# Altium PCB 主板-20190829.PcbDoc (part 4 of 6)
Units mm, origin at the board's own origin, x right, y up, seen from the top; angles counter-clockwise.
Board outline 97.69 x 103.45 mm, 2 copper layers (Top Layer, Bottom Layer); 77 components, 70 nets, 247 pads, 251 vias.
Unrouted connection lines stored in the file: 4.
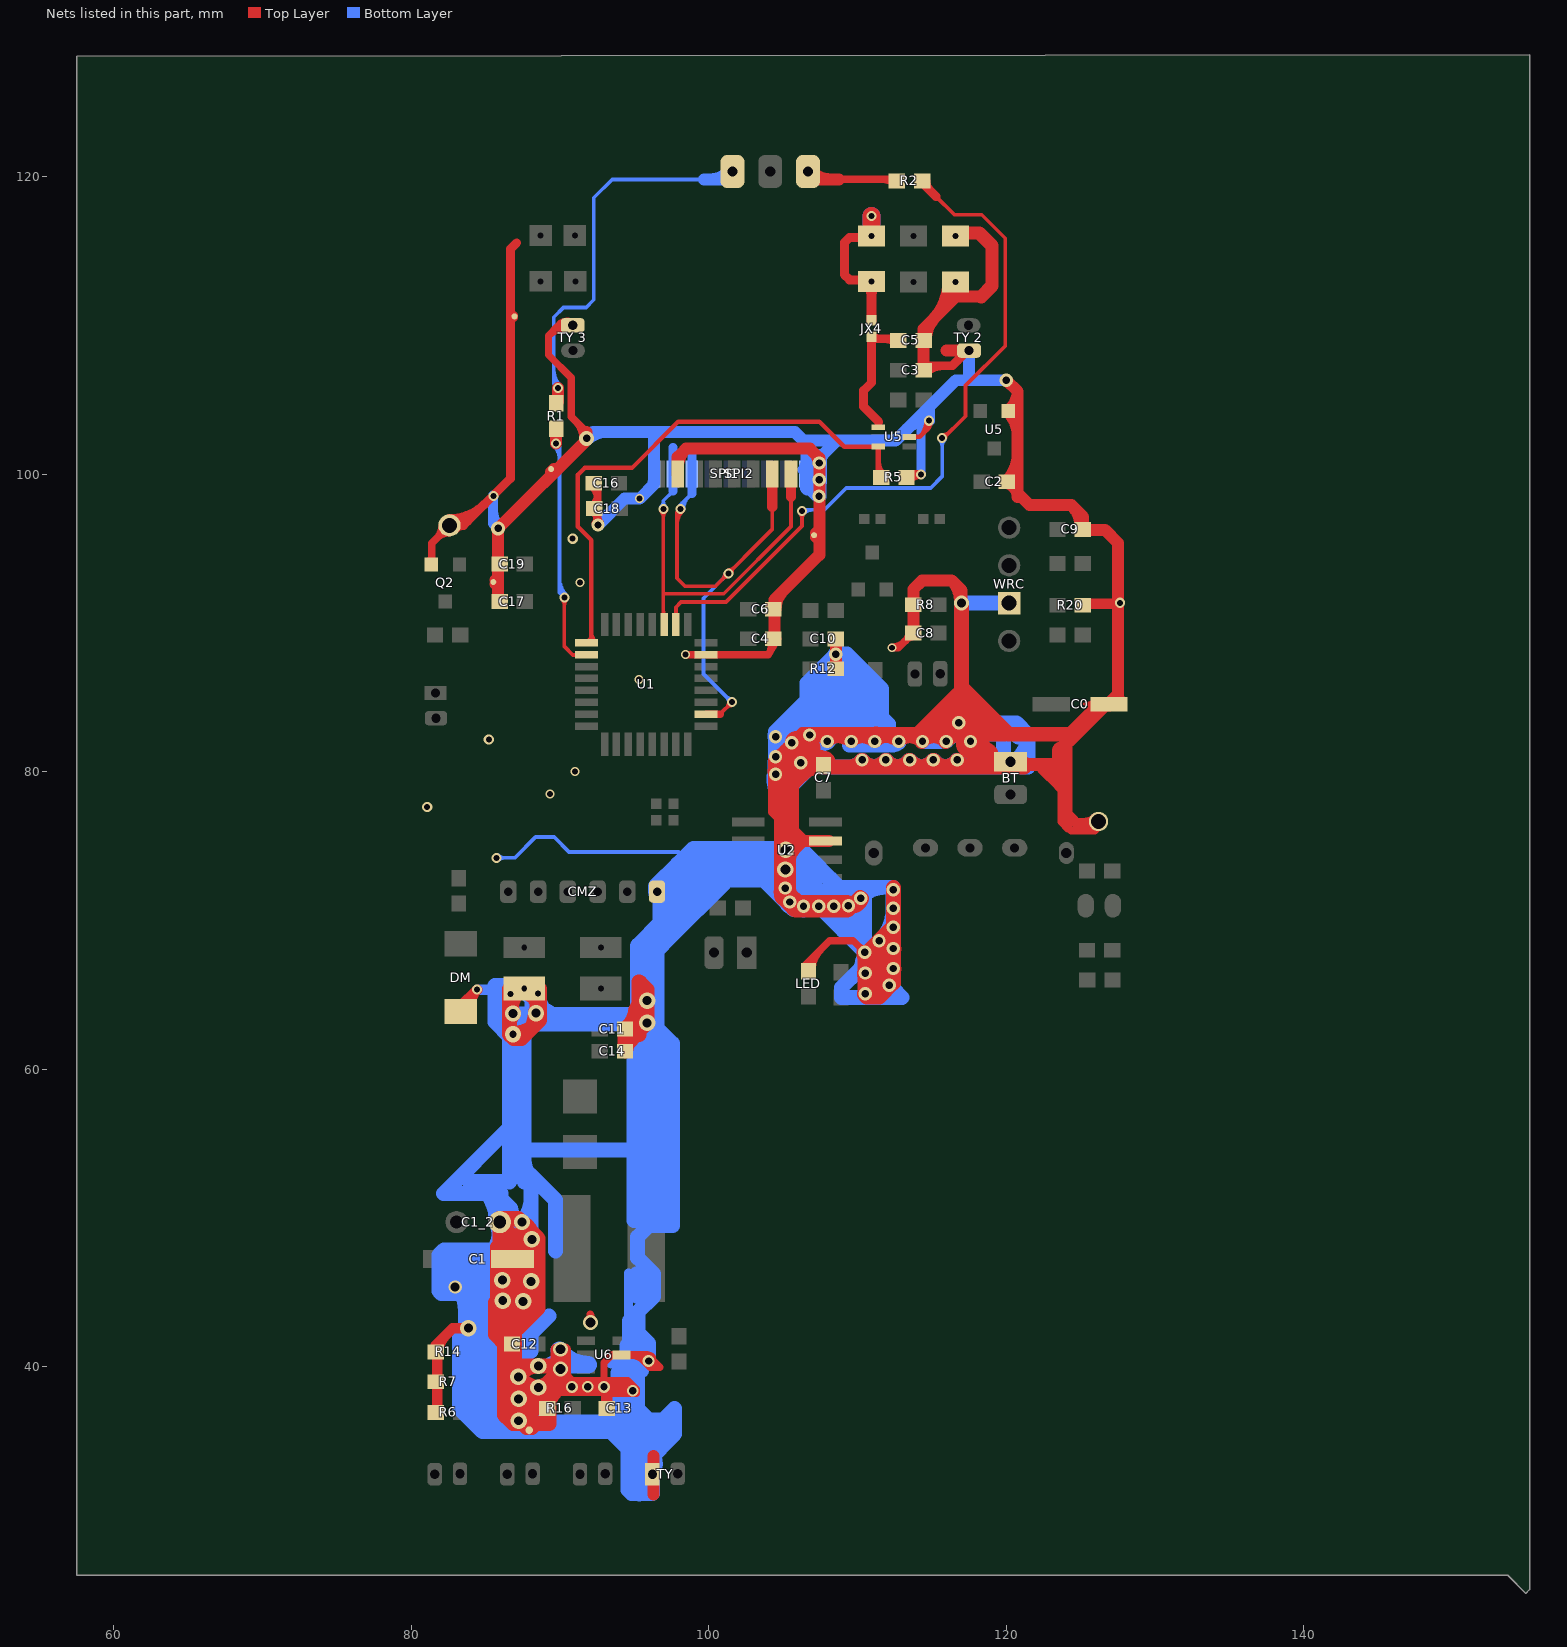
[diagram p4: the nets of this part, all layers, seen from the top]

## Via types
v1: diameter 0.9, hole 0.5, Top Layer to Bottom Layer, 107 vias
v2: diameter 0.68, hole 0.4, Top Layer to Bottom Layer, 87 vias
v3: diameter 1.1, hole 0.6, Top Layer to Bottom Layer, tented both sides, 17 vias
v4: diameter 0.6, hole 0.4, Top Layer to Bottom Layer, 7 vias
v5: diameter 0.8, hole 0.5, Top Layer to Bottom Layer, 5 vias
v6: diameter 0.7, hole 0.4, Top Layer to Bottom Layer, 5 vias
v7: diameter 1, hole 0.6, Top Layer to Bottom Layer, 4 vias
v8: diameter 1, hole 0.8, Top Layer to Bottom Layer, tented both sides, 4 vias
v9: diameter 1, hole 0.65, Top Layer to Bottom Layer, tented both sides, 4 vias
v10: diameter 1.2, hole 0.7, Top Layer to Bottom Layer, tented both sides, 2 vias
v11: diameter 1.1, hole 0.68, Top Layer to Bottom Layer, 2 vias
v12: diameter 0.8, hole 0.4, Top Layer to Bottom Layer, 2 vias
v13: diameter 0.9, hole 0.6, Top Layer to Bottom Layer, tented bottom, 1 vias
v14: diameter 0.95, hole 0.5, Top Layer to Bottom Layer, 1 vias
v15: diameter 0.9, hole 0.6, Top Layer to Bottom Layer, tented both sides, 1 vias
v16: diameter 1, hole 0.5, Top Layer to Bottom Layer, 1 vias
v17: diameter 1.1, hole 0.5, Top Layer to Bottom Layer, tented both sides, 1 vias

## Nets (pads, with @x,y where several pads share a name; then routed paths per layer and width w, separated by ;. In a path a pad name is that pad's centre, name@x,y a point inside that pad or via, vN(x,y) a via of type N, cw(c..) or ccw(c..) an arc to the next point about the centre after c; other vN are vias at no path point) (continued)
GND: (continued)
  Bottom Layer w1: 82.677,45.918 ccw(c83.51,45.918) 82.921,45.329 ccw(c83.939,46.347) 83.939,44.907 ; 82.677,47.346 82.677,45.39 82.702,45.364 83.642,45.364 ; v15@82.925,45.403 cw(c83.262,44.984) 83.642,45.364 ; v15@82.956,45.414 cw(c82.956,43.879) 84.042,44.965 ; v15@82.96,45.414 cw(c82.904,44.679) 83.642,44.679 ; v15@82.992,45.329 ccw(c81.421,46.899) 83.642,46.899 ; v15@82.992,45.4 cw(c81.421,43.829) 83.642,43.829 ; v15@82.994,45.331 cw(c82.042,46.187) 82.042,44.907 ; 83.236,41.003 cw(c85.438,41.003) 83.881,42.56 ccw(c84.457,41.985) 83.642,41.985 ; 83.236,41.734 cw(c84.079,41.734) v3@83.858,42.548 ; 83.642,43.207 ccw(c84.457,43.207) 83.881,42.631 ccw(c84.686,43.436) 84.686,42.298 ; v3@83.81,42.631 ccw(c83.111,43.33) 84.099,43.33 ; v3@83.838,42.546 cw(c83.682,41.541) 84.7,41.541 ; v3@83.838,42.546 cw(c83.699,41.556) 84.7,41.556 ; v3@83.868,42.64 ccw(c84.314,43.524) 85.014,42.824 ; 83.871,52.476 84.861,52.476 ; v3@83.89,42.618 ccw(c84.404,42.87) 84.404,42.298 84.741,42.298 84.995,42.552 ; v3@83.896,42.215 83.896,40.538 84.112,40.322 ; v3@83.976,42.726 v3(83.845,42.596) ; v3@84.049,42.799 v3(83.845,42.596) ; v3@84.099,42.603 84.099,44.907 ; 84.7,37.681 85.103,37.681 85.242,37.821 ; 84.7,42.002 84.7,41.977 ; 84.712,41.99 84.7,41.977 ; 85.119,41.279 85.271,41.431 86.055,42.215 ; 85.242,40.366 85.242,39.192 ; 85.325,35.636 ccw(c85.325,38.272) v3@87.188,36.408 ; 85.446,51.689 85.496,51.638 ; 85.555,43.284 cw(c86.873,43.284) v3@86.183,44.407 ; 85.555,44.309 cw(c87.644,44.309) 86.167,45.786 ccw(c86.69,45.263) 85.95,45.263 ; 85.555,46.024 ccw(c87.731,46.024) 86.192,44.485 cw(c86.777,45.07) 85.95,45.07 ; C1_2.1@85.7,49.737 ccw(c82.701,49.858) 84.823,51.981 86.335,50.47 86.335,48.717 ; C1_2.1@85.73,49.609 cw(c84.419,48.905) 85.471,47.854 ; C1_2.1@85.761,49.891 ccw(c84.793,50.732) 85.7,51.638 ; 85.776,64.442 85.776,64.059 ; C1_2.1@85.794,49.532 cw(c84.892,48.406) 86.335,48.406 ; 85.851,39.929 ccw(c87.204,41.282) v3@87.204,39.369 ; 85.862,46.304 85.555,46.612 ; 85.941,63.69 cw(c88.05,63.69) pad.0@86.559,65.181 ; 85.95,43.83 cw(c86.777,43.83) v3@86.192,44.415 ; 85.95,46.38 ccw(c86.69,46.38) v3@86.167,45.857 ; v3@85.978,45.467 ccw(c86.615,45.092) v3@86.186,44.491 ; 86.004,52.476 84.861,52.476 ; 86.055,51.638 85.7,51.638 ; v3@86.096,45.786 cw(c84.416,44.107) 86.792,44.107 ; v3@86.096,45.857 ccw(c84.416,47.537) 86.792,47.537 ; 86.107,62.712 ccw(c86.843,63.448) v17@86.843,62.407 ; v3@86.121,44.485 ccw(c84.503,46.104) 86.792,46.104 ; v3@86.123,44.487 ccw(c85.58,45.085) v3@86.266,45.512 ; v3@86.132,44.406 cw(c85.499,43.279) 86.792,43.279 ; v3@86.158,45.864 cw(c86.865,46.967) 85.555,46.967 ; 86.423,48.805 ccw(c85.658,49.57) 86.611,50.082 ; 86.438,50.367 cw(c85.804,49.733) 86.699,49.697 ; 86.458,50.879 cw(c85.605,50.026) 86.516,49.236 ; 86.614,36.263 cw(c88.792,36.263) v3@87.259,37.81 ; 86.614,36.386 86.614,39.167 ; 86.614,37.775 cw(c88.748,37.775) v3@87.239,39.284 ; 86.614,37.965 ccw(c88.816,37.965) 87.259,36.408 ccw(c89.123,38.272) 89.123,35.636 ; 86.614,52.426 v17@86.614,62.205 ; 86.614,54.576 87.6,54.576 ; 86.614,56.032 86.563,56.032 82.169,51.638 85.7,51.638 ; 86.614,61.684 cw(c87.515,61.684) v17@86.878,62.322 ; 86.614,63.03 ccw(c87.515,63.03) v17@86.878,62.392 ; 86.614,63.081 cw(c87.515,63.081) v3@86.878,63.719 ; v3@86.614,63.833 v17@86.614,62.205 ; 86.665,48.689 cw(c87.684,48.689) v3@87.463,49.684 ; pad.0@86.764,65.187 ccw(c86.366,64.736) 85.941,65.161 ; 86.778,54.872 86.778,54.951 ; 86.792,43.211 cw(c88.033,43.211) v3@87.548,44.353 ; 86.792,46.298 ccw(c89.427,46.298) v3@87.564,44.435 ; v17@86.807,62.322 cw(c84.893,60.408) 87.6,60.408 ; pad.0@86.808,65.201 ccw(c86.396,64.706) 85.941,65.161 ; v3@86.828,63.802 cw(c86.513,64.796) 85.776,64.059 ; v3@86.84,63.704 ccw(c86.775,62.526) 85.941,63.36 ; v3@86.861,63.8 cw(c87.407,65.161) 85.941,65.161 ; 86.868,41.021 86.893,41.046 ; v3@87.061,36.747 cw(c87.776,37.164) v3@87.255,37.807 ; v3@87.077,38.155 cw(c87.796,38.628) v3@87.236,39.281 ; v3@87.254,37.886 cw(c88.216,39.167) 86.614,39.167 ; v3@87.396,44.071 86.792,43.466 ; pad.0@87.398,65.634 85.629,65.634 85.629,65.354 85.629,63.19 v17@86.614,62.205 ; v3@87.417,49.698 cw(c85.86,48.141) v3@88.062,48.141 ; v3@87.417,49.769 ccw(c85.86,51.326) 88.062,51.326 ; v3@87.458,49.783 cw(c87.561,50.673) 86.665,50.673 ; v3@87.482,44.381 cw(c86.097,43.843) 87.147,42.792 87.916,43.561 ; v3@87.493,44.364 cw(c86.12,42.991) 88.062,42.991 ; v3@87.494,44.436 ccw(c86.267,45.745) v3(88.062,45.745) ; 87.6,52.68 87.6,54.576 ; 87.6,62.944 87.6,54.576 ; pad.0@87.6,65.432 86.208,65.428 86.134,65.354 85.941,65.161 ; 87.8,53.119 88.062,52.857 ; 89.256,43.409 88.062,42.215 ; 89.672,36.108 92.954,36.108 ; 89.704,47.777 89.704,51.215 88.062,52.857 ; 93.955,35.636 93.426,35.636 ; 94.615,37.186 94.656,37.144 ; 94.656,38.056 cw(c95.228,38.056) v5@94.824,38.46 ; 94.656,38.722 ccw(c95.228,38.722) v5@94.824,38.318 ; 94.742,36.108 94.092,36.108 ; v5@94.965,38.318 ccw(c94.339,38.945) 95.225,38.945 ; v5@94.965,38.46 cw(c94.339,37.833) 95.225,37.833 ; 94.971,49.835 94.971,54.576 ; 94.971,62.407 94.971,54.576 ; 95.098,49.835 95.758,50.495 ; 95.148,46.228 95.148,46.076 ; 95.326,50.927 95.326,51.155 ; 95.327,61.713 cw(c97.266,61.713) v3@95.895,63.084 ; 95.329,31.446 cw(c96.428,31.446) TY.2@96.21,32.524 ; 95.329,31.618 cw(c96.235,31.618) TY.2@96.214,32.524 ; 95.329,32.669 cw(c96.181,32.669) TY.2@96.012,33.504 ; 95.504,39.739 cw(c96.368,39.739) v5@95.908,40.471 ; 95.582,34.618 cw(c94.008,33.044) TY.2@96.234,33.044 ; v3@95.824,63.084 cw(c94.758,62.017) 96.266,62.017 ; v3@95.824,63.154 ccw(c94.145,64.834) 96.52,64.834 ; v3@95.824,64.582 cw(c94.145,62.903) 96.52,62.903 ; v3@95.824,64.653 ccw(c94.145,66.333) 96.52,66.333 ; v3@95.828,64.579 cw(c95.295,63.917) v3@96.019,63.472 ; v3@95.838,63.074 cw(c95.5,62.386) 96.266,62.386 ; v3@95.858,63.069 cw(c95.831,62.381) 96.52,62.381 ; v5@95.895,40.311 cw(c96.65,41.173) 95.504,41.173 ; v3@95.904,63.142 ccw(c96.52,63.454) 96.52,62.763 ; 95.961,49.479 97.587,49.479 97.587,51.105 ; 96.012,31.987 TY.2@96.012,32.512 ; TY.2@96.012,32.065 cw(c96.653,32.065) TY.2@96.2,32.518 ; TY.2@96.012,33.484 ccw(c96.653,33.484) TY.2@96.2,33.03 ; TY.2@96.197,33.034 cw(c96.89,33.461) 96.314,34.036 ; TY.2@96.229,33.031 ccw(c95.729,33.501) 96.214,33.986 ; 96.284,35.456 96.314,35.486 ; 96.52,68.123 96.52,62.789 97.587,61.722 97.587,54.576 ; CMZ.2@96.53,71.944 97.866,71.944 99.274,71.944 99.606,72.276 ; 96.743,36.047 cw(c95.261,35.899) 96.314,34.846 ; v1@104.446,79.832 cw(c106.41,79.832) 105.021,81.221 ; v1@104.446,82.347 cw(c105.185,82.347) 104.662,82.869 ; v1@104.449,79.849 ccw(c105.444,79.489) 104.695,78.74 ; v1@104.504,79.881 cw(c104.381,79.194) 105.08,79.194 ; v1@104.53,82.384 cw(c103.378,81.131) 105.08,81.131 ; v1@104.531,79.797 ccw(c103.206,81.122) 105.08,81.122 ; v1@104.531,80.991 ccw(c103.206,82.316) 105.08,82.316 ; v1@104.531,81.061 cw(c103.206,79.736) 105.08,79.736 ; v1@104.534,79.864 cw(c104.039,79.448) 104.496,78.991 ; 105.08,80.86 cw(c106.694,80.86) 105.552,82.001 cw(c106.601,80.952) v1@106.601,82.436 ; v11(105.181,74.752) 106.274,74.752 108.788,72.238 ; v1@105.538,81.966 cw(c108.177,81.966) 106.311,83.832 ; v1@105.541,81.983 cw(c106.324,81.687) 106.324,82.525 ; v1@105.542,81.985 cw(c106.219,81.702) 106.219,82.436 ; v1@105.55,81.998 cw(c106.68,81.048) v1@106.68,82.525 ; v1@105.572,81.918 cw(c105.799,82.601) 105.08,82.601 ; v1@105.596,81.916 ccw(c105.497,82.533) 106.121,82.533 ; 105.618,79.101 ccw(c104.099,80.62) v1@106.247,80.62 ; v1@105.622,81.929 ccw(c104.538,83.083) 106.121,83.083 ; 106,82.2 cw(c106.782,81.418) 106.782,82.524 v1@106.87,82.436 ; 106.136,72.507 106.451,72.822 106.959,73.33 ; 106.649,99.094 cw(c108.943,99.094) v1@107.409,100.799 ; SPI2.8@106.649,99.963 cw(c107.5,99.963) v1@107.438,100.812 ; v1@106.733,82.462 ccw(c107.249,82.587) 107.249,82.057 ; v1@106.746,82.438 ccw(c107.668,83.36) v1@107.668,82.057 ; v1@106.805,82.43 cw(c106.533,82.945) 106.121,82.533 ; v1@106.817,82.438 ccw(c105.308,83.947) 107.442,83.947 ; v1@106.87,82.436 ccw(c107.942,83.507) v1@107.976,81.992 ; v1@107.146,82.436 cw(c107.146,81.213) 108.011,82.077 ccw(c106.931,80.998) v1@106.931,82.525 ; v1@107.406,99.679 ccw(c107.998,99.108) v1(107.417,98.527) ; v1@107.417,98.501 v1(107.417,98.527) ; v1@107.417,99.593 v1(107.417,98.527) ; v1@107.427,99.597 cw(c107.773,100.666) 106.649,100.666 106.649,99.294 v1(107.417,98.527) ; v1@107.442,99.492 v1(107.442,99.644) v1(107.442,100.762) v1@107.442,101.092 ; v1@107.928,82.06 cw(c108.471,81.857) 108.471,82.436 v1@107.975,82.436 ; v1@107.94,82.077 cw(c109.02,80.998) 109.02,82.525 ; v1@108.005,82.002 cw(c107.659,82.466) 107.249,82.057 ; v1@108.011,82.007 ccw(c106.685,83.332) 108.56,83.332 ; v1@108.179,70.915 v1@108.179,70.917 ; 108.179,71.806 108.179,72.517 ; 108.179,72.847 108.179,72.517 ; v1@108.357,70.968 ccw(c110.689,70.968) 109.04,69.319 ; v1@108.44,70.93 cw(c107.936,71.512) v1(107.391,70.968) v1(110.49,67.869) ; v1@108.452,70.946 ccw(c107.199,71.537) 108.179,72.517 ; v1@108.5,87.906 ccw(c109.093,87.945) 109.093,87.351 ; v1@108.505,87.888 ccw(c109.347,88.279) 109.347,87.351 ; v1(108.55,87.909) 106.604,85.963 106.604,84.811 104.496,82.703 v1(104.496,82.347) v1@104.496,80.696 ; 109.267,80.315 ccw(c109.267,81.842) v1@110.347,80.762 ; v1@109.348,70.993 ccw(c111.005,70.993) 109.833,69.821 ; v1@109.356,71.02 cw(c110.236,70.455) v1(110.236,71.501) ; v1@109.358,71.023 ccw(c109.83,70.664) 109.41,70.244 ; v1@109.435,71.026 cw(c109.006,70.648) 109.411,70.244 ; v1@109.447,71.002 cw(c108.279,70.791) 109.118,69.952 109.41,70.244 ; v1@109.539,82.076 cw(c110.583,81.083) 110.583,82.525 ; v1@109.54,82.007 ccw(c110.068,82.535) 110.068,81.788 ; 109.56,66.126 cw(c110.515,65.171) v1@110.515,66.522 ; v1@109.611,82.077 ccw(c108.56,81.066) 108.56,82.525 ; 109.728,86.233 110.363,85.598 110.363,82.781 110.583,82.561 ; 110.001,66.567 ccw(c108.698,67.869) v1@110.54,67.869 ; 110.023,64.821 ccw(c110.023,65.567) v1@110.551,65.039 ; 110.131,82.525 cw(c110.131,80.998) v1@111.211,82.077 ; 110.134,69.52 109.41,70.244 ; v1@110.201,71.536 cw(c111.894,69.843) 111.894,72.238 ; v1@110.238,64.821 ccw(c110.238,67.562) 112.176,65.624 ccw(c111.648,66.152) 112.395,66.152 ; v1@110.271,71.536 cw(c109.743,71.008) 110.49,71.008 ; v1@110.275,71.533 ccw(c108.788,70.318) 108.788,72.238 ; v1@110.276,80.762 ccw(c111.356,81.842) 111.356,80.315 ; 110.365,67.337 ccw(c111.368,67.007) v1@110.473,66.445 ; v1@110.48,65.039 ccw(c111.008,65.567) 111.008,64.821 ; v1@110.528,67.901 cw(c110.047,67.499) 110.49,67.056 ; 110.683,81.788 ccw(c110.683,82.535) v1@111.211,82.007 ; 110.867,80.315 ccw(c110.867,81.842) v1@111.947,80.762 ; v1@111.137,82.074 cw(c112.092,81.286) 112.092,82.525 ; v1@111.14,82.007 ccw(c111.668,82.535) 111.668,81.788 ; v1@111.159,81.995 ccw(c111.584,83.238) v1@112.513,82.309 ; v1@111.491,68.595 ccw(c109.307,70.779) v1@112.395,70.779 ; v1@111.491,68.666 cw(c109.307,66.483) v1@112.395,66.483 ; 111.731,82.525 cw(c111.731,80.998) v1@112.811,82.077 ; v1@111.876,80.762 ccw(c112.956,81.842) 112.956,80.315 ; v1@112.091,65.654 ccw(c113.005,65.738) 113.005,64.821 ; 112.467,80.315 ccw(c112.467,81.842) v1@113.547,80.762 ; v1@112.74,82.077 cw(c113.82,80.998) 113.82,82.525 ; v1@112.748,82 cw(c113.533,83.208) 112.092,83.208 ; v1@112.778,82.092 ccw(c112.729,81.052) 111.992,81.788 ; v1@112.813,82.074 ccw(c112.308,81.648) 112.308,82.309 ; 113.331,82.525 cw(c113.331,80.998) v1@114.411,82.077 ; v1@113.476,80.762 ccw(c114.556,81.842) 114.556,80.315 ; 114.067,80.315 ccw(c114.067,81.842) v1@115.147,80.762 ; v1@114.34,82.077 cw(c115.42,80.998) 115.42,82.525 ; v1(114.375,82.042) 115.545,82.042 116.027,82.525 ; 114.931,82.525 cw(c114.931,80.998) v1@116.011,82.077 ; v1@115.076,80.762 ccw(c116.156,81.842) 116.156,80.315 ; 115.667,80.315 ccw(c115.667,81.842) v1@116.747,80.762 ; v1@115.925,82.042 cw(c116.844,82.042) 116.194,82.692 ; v1@115.94,82.077 cw(c117.02,80.998) 117.02,82.525 ; 116.558,82.525 cw(c116.558,80.998) v1@117.637,82.077 ; v1@116.676,80.762 ccw(c117.756,81.842) 117.756,80.315 ; v1@116.779,83.277 ccw(c118.595,85.092) 118.595,82.525 ; v1@116.864,83.309 cw(c116.027,83.364) 116.027,82.525 ; v7@117.17,91.345 WRC.2@120.2,91.345 ; v1@117.567,82.077 cw(c118.646,80.998) 118.646,82.525 ; 118.618,80.315 ccw(c118.618,81.903) BT.2@119.741,80.78 ; BT.2@119.797,80.533 ccw(c119.484,79.658) 118.828,80.315 ; BT.2@119.954,80.369 ccw(c120.033,80.399) BT.2@120.033,80.315 ; BT.2@120.297,80.674 BT.2@120.297,80.315 ; BT.2@120.655,80.792 ccw(c119.324,82.499) 121.488,82.499 ; 120.828,82.321 119.99,83.16 119.99,83.287 ; BT.2@120.887,80.728 ccw(c121.488,80.959) 121.488,80.315 ; 82.042,44.907 81.864,45.085 81.864,47.523 82.194,47.854 83.948,47.854 ; 82.042,44.907 83.642,44.907 ; v3@83.642,42.393 83.236,41.986 83.236,37.186 84.785,35.636 92.481,35.636 ; v3@83.642,42.393 v3(83.845,42.596) ; v3@83.642,42.393 83.642,38.151 84.112,37.681 ; v3@83.642,42.393 83.642,43.06 83.642,44.907 ; 83.642,44.907 cw(c83.642,45.738) 82.912,45.34 ccw(c83.642,45.738) 83.642,44.907 ; 83.642,44.907 84.099,44.907 ; 83.642,44.907 83.642,45.364 ; 83.642,45.364 84.099,44.907 ; 83.642,45.364 83.642,47.547 ; 83.642,47.547 83.948,47.854 ; 83.642,47.547 83.947,47.547 84.099,47.395 84.099,44.907 ; 83.948,47.854 85.471,47.854 ; 84.099,44.907 85.014,43.993 ; 84.112,37.681 84.112,36.614 84.7,37.202 84.7,39.735 ; 84.112,37.681 84.112,40.322 ; 84.112,40.322 84.112,41.389 84.7,41.977 ; 84.112,40.322 84.7,39.735 ; 84.7,39.735 85.242,39.192 ; 84.7,39.735 84.7,41.977 ; 84.734,41.046 ccw(c86.12,42.432) 86.354,40.486 ; 84.734,41.046 ccw(c86.12,42.432) 86.354,40.486 ; 84.734,41.046 ccw(c86.12,42.432) 86.354,40.486 ; 84.734,41.046 86.614,39.167 ; 84.734,41.046 85.656,41.046 ; 84.861,52.476 85.7,51.638 ; 84.995,42.552 85.014,42.57 ; 84.995,42.552 85.014,42.552 85.014,42.57 ; 84.995,42.552 84.741,42.552 85.014,42.824 ; 85.014,42.57 85.014,42.824 ; 85.014,42.57 85.598,43.155 85.598,43.409 85.555,43.452 ; 85.014,42.824 85.014,43.993 ; 85.014,42.824 85.555,43.365 85.555,43.452 ; 85.014,43.993 85.014,47.396 85.471,47.854 ; 85.014,43.993 85.555,43.452 ; 85.242,37.821 85.496,38.075 85.496,36.144 84.658,36.982 85.242,37.567 85.242,37.821 ; 85.242,37.821 85.242,39.192 ; 85.242,39.192 86.055,38.379 86.055,36.297 92.765,36.297 92.954,36.108 ; 85.242,46.924 cw(c85.685,46.482) 86.122,46.929 ; 85.242,46.924 cw(c85.685,46.482) 86.122,46.929 ; 85.242,46.924 cw(c85.685,46.482) 86.122,46.929 ; 85.242,46.924 85.42,47.102 ; 85.242,46.924 85.555,46.612 ; 85.42,46.912 cw(c87.084,46.912) 86.159,48.295 ; 85.42,46.912 cw(c87.084,46.912) 86.159,48.295 ; 85.42,46.912 cw(c87.084,46.912) 86.159,48.295 ; 85.42,47.102 ccw(c85.837,47.519) 86.132,47.008 ; 85.42,47.102 ccw(c85.837,47.519) 86.132,47.008 ; 85.42,47.102 ccw(c85.837,47.519) 86.132,47.008 ; 85.42,47.102 85.555,46.967 ; 85.42,47.102 85.95,47.632 ; 85.471,47.854 86.335,48.717 ; 85.471,47.854 85.725,47.854 86.335,48.463 86.335,48.717 ; 85.555,43.452 85.555,46.612 ; 85.555,46.612 ccw(c86.316,46.612) 86.143,45.87 cw(c86.316,46.612) 85.555,46.612 ; 85.555,46.612 85.555,46.967 ; 85.656,41.046 cw(c85.656,40.391) 86.31,40.434 ; 85.656,41.046 cw(c85.656,40.391) 86.31,40.434 ; 85.656,41.046 cw(c85.656,40.391) 86.31,40.434 ; 85.674,41.046 cw(c85.674,40.41) 86.31,40.435 ccw(c85.674,40.41) 85.674,41.046 ; 85.674,41.046 86.893,41.046 ; 85.676,47.358 ccw(c84.698,48.336) 86.081,48.336 ; 85.676,47.358 ccw(c84.698,48.336) 86.081,48.336 ; 85.676,47.358 ccw(c84.698,48.336) 86.081,48.336 ; 85.7,51.638 86.665,50.673 ; 85.776,64.059 85.941,63.894 ; 85.941,63.36 85.941,63.894 ; 85.941,63.36 86.208,63.627 85.941,63.894 ; 85.941,63.894 ccw(c86.439,64.392) 86.816,63.796 cw(c86.439,64.392) 85.941,63.894 ; 85.941,63.894 85.941,65.161 ; 85.95,42.624 85.95,47.632 ; 85.95,42.624 86.792,43.466 ; 85.95,42.624 85.95,42.472 86.792,43.314 86.792,43.466 ; 85.95,47.585 ccw(c86.777,47.585) 86.192,47 ; 85.95,47.585 ccw(c86.777,47.585) 86.192,47 ; 85.95,47.585 ccw(c86.777,47.585) 86.192,47 ; 85.95,47.585 ccw(c86.777,47.585) 86.192,47 ; 85.95,47.585 ccw(c86.777,47.585) 86.192,47 ; 85.95,47.585 ccw(c86.777,47.585) 86.192,47 ; 85.95,47.585 ccw(c86.777,47.585) 86.192,47 ; 85.95,47.585 ccw(c86.777,47.585) 86.192,47 ; 85.95,47.585 ccw(c86.777,47.585) 86.192,47 ; 85.95,47.632 ccw(c85.506,48.075) 86.085,48.317 ; 85.95,47.632 ccw(c85.506,48.075) 86.085,48.317 ; 85.95,47.632 ccw(c85.506,48.075) 86.085,48.317 ; 85.95,47.632 ccw(c85.506,48.075) 86.085,48.317 ; 85.95,47.632 ccw(c85.506,48.075) 86.085,48.317 ; 85.95,47.632 ccw(c85.506,48.075) 86.085,48.317 ; 85.95,47.632 86.792,48.473 ; 85.95,47.778 cw(c86.69,47.778) 86.167,48.301 ; 85.95,47.778 cw(c86.69,47.778) 86.167,48.301 ; 85.95,47.778 cw(c86.69,47.778) 86.167,48.301 ; 85.95,47.778 cw(c86.69,47.778) 86.167,48.301 ; 85.95,47.778 cw(c86.69,47.778) 86.167,48.301 ; 85.95,47.778 cw(c86.69,47.778) 86.167,48.301 ; 85.95,47.778 cw(c86.69,47.778) 86.167,48.301 ; 85.95,47.778 cw(c86.69,47.778) 86.167,48.301 ; 85.95,47.778 cw(c86.69,47.778) 86.167,48.301 ; 86.032,47.242 cw(c86.712,47.693) 86.165,48.299 ; 86.032,47.242 cw(c86.712,47.693) 86.165,48.299 ; 86.032,47.242 cw(c86.712,47.693) 86.165,48.299 ; 86.032,47.242 cw(c86.712,47.693) 86.165,48.299 ; 86.032,47.242 cw(c86.712,47.693) 86.165,48.299 ; 86.032,47.242 cw(c86.712,47.693) 86.165,48.299 ; 86.048,41.046 cw(c86.048,38.931) 87.544,40.427 ; 86.048,41.046 cw(c86.048,38.931) 87.544,40.427 ; 86.048,41.046 cw(c86.048,38.931) 87.544,40.427 ; 86.102,48.296 cw(c85.656,47.674) 86.288,47.241 ; 86.102,48.296 cw(c85.656,47.674) 86.288,47.241 ; 86.102,48.296 cw(c85.656,47.674) 86.288,47.241 ; 86.102,48.296 cw(c85.656,47.674) 86.288,47.241 ; 86.102,48.296 cw(c85.656,47.674) 86.288,47.241 ; 86.102,48.296 cw(c85.656,47.674) 86.288,47.241 ; 86.11,48.291 cw(c85.896,47.826) 86.392,47.701 ; 86.11,48.291 cw(c85.896,47.826) 86.392,47.701 ; 86.11,48.291 cw(c85.896,47.826) 86.392,47.701 ; 86.11,48.291 cw(c85.896,47.826) 86.392,47.701 ; 86.11,48.291 cw(c85.896,47.826) 86.392,47.701 ; 86.11,48.291 cw(c85.896,47.826) 86.392,47.701 ; 86.123,47.002 ccw(c85.58,47.6) 86.266,48.027 ; 86.123,47.002 ccw(c85.58,47.6) 86.266,48.027 ; 86.123,47.002 ccw(c85.58,47.6) 86.266,48.027 ; 86.124,47.002 ccw(c84.838,48.473) 86.792,48.473 ; 86.124,47.002 ccw(c84.838,48.473) 86.792,48.473 ; 86.124,47.002 ccw(c84.838,48.473) 86.792,48.473 ; 86.152,48.382 ccw(c86.391,48.925) 86.859,48.56 ; 86.152,48.382 ccw(c86.391,48.925) 86.859,48.56 ; 86.152,48.382 ccw(c86.391,48.925) 86.859,48.56 ; 86.152,48.382 ccw(c86.391,48.925) 86.859,48.56 ; 86.152,48.382 ccw(c86.391,48.925) 86.859,48.56 ; 86.152,48.382 ccw(c86.391,48.925) 86.859,48.56 ; 86.155,48.38 ccw(c86.411,48.854) 86.792,48.473 ; 86.155,48.38 ccw(c86.411,48.854) 86.792,48.473 ; 86.155,48.38 ccw(c86.411,48.854) 86.792,48.473 ; 86.207,46.967 cw(c88.209,47.056) 86.792,48.473 ; 86.207,46.967 cw(c88.209,47.056) 86.792,48.473 ; 86.207,46.967 cw(c88.209,47.056) 86.792,48.473 ; 86.335,48.717 86.665,49.047 86.665,50.673 ; 86.395,40.401 cw(c87.952,38.844) 87.952,41.046 ; 86.395,40.401 cw(c87.952,38.844) 87.952,41.046 ; 86.395,40.401 cw(c87.952,38.844) 87.952,41.046 ; 86.401,40.408 cw(c86.939,40.029) 87.286,40.587 ; 86.401,40.408 cw(c86.939,40.029) 87.286,40.587 ; 86.401,40.408 cw(c86.939,40.029) 87.286,40.587 ; 86.401,40.408 cw(c86.939,40.029) 87.286,40.587 ; 86.41,40.442 cw(c88.957,40.691) 87.147,42.501 ; 86.41,40.442 cw(c88.957,40.691) 87.147,42.501 ; 86.41,40.442 cw(c88.957,40.691) 87.147,42.501 ; 86.646,40.553 cw(c87.017,39.941) 87.543,40.428 ; 86.646,40.553 cw(c87.017,39.941) 87.543,40.428 ; 86.646,40.553 cw(c87.017,39.941) 87.543,40.428 ; 86.731,53.985 ccw(c84.633,56.083) 87.6,56.083 ; 86.731,53.985 ccw(c84.633,56.083) 87.6,56.083 ; 86.731,53.985 ccw(c84.633,56.083) 87.6,56.083 ; 86.742,53.906 cw(c85.902,52.43) 87.6,52.43 ; 86.742,53.906 cw(c85.902,52.43) 87.6,52.43 ; 86.742,53.906 cw(c85.902,52.43) 87.6,52.43 ; 86.792,43.466 86.792,48.473 ; 86.792,48.473 ccw(c88.681,48.473) 87.558,46.954 ; 86.792,48.473 ccw(c88.681,48.473) 87.558,46.954 ; 86.792,48.473 ccw(c88.681,48.473) 87.558,46.954 ; 86.893,41.046 88.062,42.215 ; 86.893,41.046 88.062,41.046 88.062,42.215 ; 87.544,40.498 ccw(c86.293,41.748) 88.062,41.748 ; 87.544,40.498 ccw(c86.293,41.748) 88.062,41.748 ; 87.544,40.498 ccw(c86.293,41.748) 88.062,41.748 ; 87.6,53.869 ccw(c89.124,53.869) 88.046,52.791 ; 87.6,53.869 ccw(c89.124,53.869) 88.046,52.791 ; 87.6,53.869 ccw(c89.124,53.869) 88.046,52.791 ; 87.6,54.576 94.971,54.576 ; 88.062,42.215 v3(88.062,45.745) ; v3(88.062,45.745) 88.062,52.857 ; 92.481,35.636 92.954,36.108 ; 92.481,35.636 93.426,35.636 ; 92.954,36.108 93.523,36.678 94.092,36.108 ; 92.954,36.108 93.426,35.636 ; 92.954,36.108 94.092,36.108 ; 93.426,35.636 94.564,34.498 ; 94.092,36.108 96.214,33.986 ; 94.564,34.498 94.564,31.773 94.564,31.725 94.819,31.47 96.214,31.47 TY.2@96.214,32.714 ; 94.564,34.498 95.329,33.734 95.329,32.537 95.329,31.925 95.377,31.877 TY.2@96.012,32.512 ; 94.656,37.144 96.314,35.486 ; 94.656,37.144 94.656,43.094 95.241,43.679 ; 94.656,37.144 94.656,36.432 96.284,34.804 ; 94.971,54.576 95.327,54.576 ; 95.148,46.076 95.148,44.806 95.225,44.729 ; 95.148,46.076 95.225,46.152 95.225,44.729 ; 95.225,44.729 95.898,45.402 95.898,46.647 ; 95.241,43.679 95.241,42.078 95.463,42.078 95.961,41.58 v5(95.961,40.386) 95.504,39.929 95.504,41.173 ; 95.241,43.679 96.291,44.729 96.291,46.253 95.898,46.647 ; 95.327,54.576 95.327,62.763 96.52,62.763 ; 95.327,54.576 95.327,50.926 95.758,50.495 ; 95.327,54.576 96.266,54.576 ; 95.504,41.173 94.92,41.758 94.92,39.345 95.225,39.649 95.225,37.173 95.965,36.432 96.947,36.432 97.714,37.199 97.714,35.481 96.763,34.53 96.763,34.485 96.314,34.036 ; 95.758,50.495 96.368,49.886 96.368,50.165 96.266,50.063 96.266,54.576 ; v3@95.86,63.069 cw(c95.86,62.212) 96.465,62.818 ccw(c95.86,62.212) v3@95.86,63.069 ; v3@95.86,63.069 cw(c95.86,62.151) 96.509,62.8 ccw(c95.86,62.151) v3@95.86,63.069 ; 95.898,46.647 95.225,47.32 95.225,48.743 96.901,50.419 ; TY.2@96.012,32.512 96.012,33.734 96.214,33.936 ; TY.2@96.012,32.512 TY.2@96.214,32.714 ; TY.2@96.199,33.031 cw(c96.674,33.476) 96.214,33.936 ; TY.2@96.199,33.031 cw(c96.674,33.476) 96.214,33.936 ; TY.2@96.214,32.714 TY.2@96.214,32.774 96.214,33.936 ; 96.214,33.936 96.284,34.006 ; 96.214,33.936 96.214,33.986 ; 96.266,54.576 96.901,54.576 ; 96.266,54.576 96.266,62.509 96.52,62.763 ; 96.284,34.006 ccw(c96.823,33.468) 96.198,33.033 cw(c96.823,33.468) 96.284,34.006 ; 96.284,34.006 96.314,34.036 ; 96.284,34.006 96.284,34.804 ; 96.284,34.804 96.284,34.816 96.314,34.846 ; 96.284,34.804 96.314,34.774 ; 96.314,34.036 96.314,34.774 ; 96.314,34.774 96.314,34.846 ; 96.314,34.846 97.358,35.89 97.231,36.017 96.845,36.017 96.314,35.486 ; 96.314,34.846 96.314,35.486 ; 96.52,62.763 96.901,62.382 96.901,54.576 ; 96.674,35.846 ccw(c96.502,36.017) 96.745,36.017 ; 96.674,35.846 ccw(c96.502,36.017) 96.745,36.017 ; 96.674,35.846 ccw(c96.502,36.017) 96.745,36.017 ; 96.901,50.419 97.176,50.694 ; 96.901,50.419 96.901,54.576 ; 96.901,54.576 97.176,54.576 ; 97.176,50.694 97.176,54.576 ; 97.176,50.694 97.587,51.105 ; 97.176,54.576 97.587,54.576 ; 97.587,51.105 97.587,54.576 ; 104.496,78.991 105.08,79.575 105.08,81.28 ; 104.496,78.991 v1@104.496,80.696 ; v1@104.496,80.696 105.08,81.28 ; v1@104.496,80.696 104.47,80.67 104.47,78.965 104.696,78.74 ; v1@104.496,80.976 ccw(c104.496,81.652) 104.974,81.174 ; v1@104.496,80.976 ccw(c104.496,81.652) 104.974,81.174 ; v1@104.496,80.976 ccw(c104.496,81.652) 104.974,81.174 ; 104.696,78.74 ccw(c104.696,79.429) 105.356,79.234 ; 104.696,78.74 ccw(c104.696,79.429) 105.356,79.234 ; 104.696,78.74 ccw(c104.696,79.429) 105.356,79.234 ; 104.696,78.74 105.258,78.74 106.832,80.315 118.828,80.315 ; 105.08,81.28 106.235,82.436 ; 105.08,81.28 105.08,82.601 ; 105.08,82.601 106.782,84.303 ; 105.308,79.198 ccw(c105.308,80.181) 106.004,79.486 ; 105.308,79.198 ccw(c105.308,80.181) 106.004,79.486 ; 105.308,79.198 ccw(c105.308,80.181) 106.004,79.486 ; 105.321,79.2 ccw(c105.05,80.211) 105.957,79.688 ; 105.321,79.2 ccw(c105.05,80.211) 105.957,79.688 ; 105.321,79.2 ccw(c105.05,80.211) 105.957,79.688 ; 105.321,79.2 ccw(c105.05,80.211) 105.957,79.688 ; 105.321,79.2 ccw(c105.05,80.211) 105.957,79.688 ; 105.321,79.2 ccw(c105.05,80.211) 105.957,79.688 ; 106.121,82.533 106.219,82.436 ; 106.121,82.533 106.121,83.083 ; 106.121,83.083 v1@106.68,82.525 ; 106.219,82.436 106.235,82.436 ; 106.235,82.436 ccw(c106.235,81.676) 105.542,81.986 cw(c106.235,81.676) 106.235,82.436 ; 106.235,82.436 106.324,82.525 ; 106.235,82.436 v1@106.87,82.436 ; 106.324,82.525 v1@106.68,82.525 ; v1@106.68,82.525 v1@106.782,82.525 ; v1@106.782,82.525 106.782,84.303 ; v1@106.782,82.525 v1@106.931,82.525 ; 106.782,84.303 106.782,84.379 107.112,84.709 107.15,84.671 ; 106.782,84.303 107.15,84.671 ; v1@106.87,82.436 107.249,82.057 ; v1@106.87,82.436 v1@107.975,82.436 ; v1@106.931,82.525 107.975,82.525 ; v1@106.931,82.525 107.442,83.036 107.442,84.379 107.15,84.671 ; 107.15,84.671 107.975,85.496 ; 107.249,82.057 v1@107.927,82.057 ; v1@107.927,82.057 cw(c108.56,81.864) 108.56,82.525 ; v1@107.927,82.057 cw(c108.56,81.864) 108.56,82.525 ; v1@107.927,82.057 107.975,82.105 v1@107.975,82.436 ; v1@107.975,82.436 107.975,82.525 ; 107.975,82.525 107.975,85.496 ; 107.975,82.525 108.56,82.525 ; 107.975,85.496 108.56,86.081 ; 107.975,85.496 107.975,86.081 ; 107.975,86.081 107.975,86.589 106.883,85.496 106.883,85.014 107.95,86.081 107.975,86.081 ; 107.975,86.081 108.56,86.081 ; 108.179,72.517 109.195,71.501 v1(110.236,71.501) ; 108.56,82.525 109.466,82.525 ; 108.56,82.525 108.56,86.081 ; 108.56,86.081 108.56,87.909 109.296,87.909 111.633,85.573 111.633,83.668 112.092,83.208 ; 108.788,72.238 112.395,72.238 112.395,65.43 113.005,64.821 ; 109.093,87.351 109.347,87.351 ; 109.093,87.351 109.466,86.977 109.466,82.525 ; 109.347,87.351 111.049,85.649 111.049,83.026 110.583,82.561 ; 109.466,82.525 110.583,82.525 ; 109.466,82.525 109.466,81.788 111.992,81.788 ; v1(110.236,71.501) 110.49,71.247 v1(110.49,67.869) ; 110.49,67.056 v1(110.49,67.869) ; 110.49,67.056 108.941,65.507 108.941,64.821 113.005,64.821 ; 110.583,82.525 cw(c110.583,81.854) 111.223,82.057 ccw(c110.583,81.854) 110.583,82.525 ; 110.583,82.525 110.62,82.525 ; 110.583,82.525 110.583,82.561 ; 110.583,82.525 110.583,82.488 110.62,82.525 ; 110.583,82.561 110.62,82.525 ; 110.62,82.525 cw(c110.62,81.902) 111.224,82.054 ccw(c110.62,81.902) 110.62,82.525 ; 110.62,82.525 112.092,82.525 ; 111.992,81.788 v1@112.513,82.309 ; 112.092,82.525 cw(c112.092,81.72) 112.82,82.063 ccw(c112.092,81.72) 112.092,82.525 ; 112.092,82.525 112.092,83.208 ; 112.092,82.525 116.027,82.525 ; 112.092,82.525 112.308,82.309 ; 112.308,82.309 v1@112.513,82.309 ; 116.027,82.525 119.507,82.525 119.812,82.829 119.812,81.299 118.828,80.315 ; 116.027,82.525 116.789,83.287 119.99,83.287 ; 118.828,80.315 ccw(c118.828,81.439) 119.727,80.764 cw(c118.828,81.439) 118.828,80.315 ; 118.828,80.315 BT.2@120.297,80.315 ; 119.99,83.287 120.701,83.287 121.488,82.499 ; BT.2@120.297,80.315 121.488,80.315 ; 121.488,80.315 121.488,82.499 ; v15@82.969,45.413 cw(c82.74,44.54) 83.642,44.54 ccw(c82.74,44.54) v15@82.969,45.413 ; 84.768,41.046 cw(c84.768,38.844) 86.325,40.401 ccw(c84.768,38.844) 84.768,41.046 ; 85.674,40.589 ccw(c86.081,40.996) 86.338,40.482 cw(c86.081,40.996) 85.674,40.589 ; C1_2.1@85.828,49.509 cw(c85.347,48.647) 86.335,48.647 ccw(c85.347,48.647) C1_2.1@85.828,49.509 ; 95.329,32.642 cw(c96.211,32.642) 96.19,33.524 ccw(c96.211,32.642) 95.329,32.642 ; v1@104.496,82.297 ccw(c104.496,82.972) 104.974,82.495 cw(c104.496,82.972) v1@104.496,82.297 ; 105.08,81.112 cw(c106.154,81.112) 105.56,82.007 ccw(c106.154,81.112) 105.08,81.112 ; v1@106.162,80.584 ccw(c106.813,81.235) 106.813,80.315 cw(c106.813,81.235) v1@106.162,80.584 ; 108.179,71.399 ccw(c108.838,71.399) 108.372,70.932 cw(c108.838,71.399) 108.179,71.399 ; 109.268,71.428 cw(c108.833,70.993) 109.448,70.993 ccw(c108.833,70.993) 109.268,71.428 ; 112.283,81.788 ccw(c112.283,82.535) 112.811,82.007 cw(c112.283,82.535) 112.283,81.788
  Bottom Layer w1.2: pad.0@87.663,65.312 pad.0@88.197,64.778 ; pad.0@87.847,65.129 ccw(c88.519,65.801) pad.0@88.519,64.85 ; pad.0@87.909,65.066 cw(c86.622,63.779) v3@88.442,63.779 ; pad.0@88.197,64.778 cw(c87.493,64.074) 88.44,63.764 ccw(c87.493,64.074) pad.0@88.197,64.778 ; pad.0@88.287,65.194 ccw(c88.969,64.918) 88.332,64.55 ; v3@88.368,63.824 cw(c88.736,63.133) 89.289,63.686 ; v3@88.392,63.829 cw(c88.392,62.01) 89.679,63.296 ; v3@88.439,63.763 ccw(c87.514,64.079) pad.0@88.205,64.77 ; 89.484,40.132 91.897,40.132 cw(c91.897,42.529) v9@89.962,41.114 ; 89.61,40.132 cw(c89.61,39.419) v9@90.114,39.923 ; v9@89.972,39.923 cw(c90.476,39.419) 90.476,40.132 ; 94.615,37.186 94.615,41.395 ; 94.971,62.407 95.327,62.763 v3@95.708,63.144 ; 95.152,63.402 94.894,63.144 ; 95.326,63.786 cw(c96.334,63.786) v3@95.835,64.661 ; 95.326,64.286 ccw(c97.027,64.286) v3@95.824,63.084 ; 95.326,65.785 ccw(c97.027,65.785) v3@95.824,64.582 ; 95.656,63.906 95.656,66.345 ; 95.656,66.712 95.656,67.632 ; v3@95.834,63.076 cw(c96.383,63.979) 95.326,63.979 95.326,68.301 96.825,69.799 96.825,71.649 CMZ.2@96.53,71.944 96.53,72.298 97.98,73.749 98.994,74.762 102.093,74.762 ; v3@95.894,63.155 ccw(c95.4,62.639) 94.894,63.144 ; v3@95.903,64.643 cw(c94.832,64.02) v3@95.708,63.144 ; 96.241,63.677 v3@95.708,63.144 ; 96.52,68.123 97.307,68.91 ; CMZ.2@96.565,71.779 cw(c95.939,71.153) 96.825,71.153 ; 97.307,71.166 97.866,70.608 97.866,71.944 97.866,72.583 98.867,73.584 98.867,73.203 ; 98.892,72.306 100.576,73.99 99.466,73.99 99.466,73.152 ; 99.606,72.276 102.093,74.762 ; 100.774,73.317 97.307,69.85 97.307,68.91 ; 101.466,73.343 100.96,72.836 ; 103.156,73.863 ccw(c103.156,76.778) v11@105.217,74.717 ; 103.84,72.836 ccw(c103.84,74.748) v11@105.191,73.396 ; 103.95,72.836 cw(c103.95,70.981) v1@105.262,72.293 ; 104.111,72.47 ccw(c105.156,73.514) v1@105.156,72.037 ; 104.234,73.863 cw(c104.234,72.51) v11@105.191,73.467 ; v1@105.006,72.187 ccw(c106.484,72.187) v1@105.439,71.142 ; v1@105.05,72.081 ccw(c106.365,73.396) 106.365,71.536 ; v1@105.05,72.293 cw(c106.327,71.016) 106.327,72.822 ; v11@105.054,73.431 102.768,73.431 102.593,73.256 ; v1@105.068,72.308 cw(c105.552,71.638) 106.136,72.222 ; v11@105.12,73.397 ccw(c106.451,74.651) 106.451,72.822 ; v11@105.121,73.467 cw(c106.078,72.51) 106.078,73.863 ; v11@105.135,74.733 ccw(c106.426,75.256) 106.426,73.863 ; v11(105.181,74.752) 105.171,74.762 102.093,74.762 ; v11@105.206,73.429 cw(c104.583,73.46) 104.583,72.836 ; v1@105.294,72.245 cw(c104.699,71.993) v1@105.156,71.536 ; v1@105.305,72.207 ccw(c104.583,72.108) 104.583,72.836 ; v1@105.311,71.247 cw(c106.382,71.247) 105.625,72.005 ; v1@105.33,71.25 ccw(c106.375,72.295) v1@106.375,70.818 ; v1@105.355,71.141 ccw(c106.08,71.866) v1@106.08,70.841 ; v1@105.355,71.353 cw(c107.122,69.586) 107.122,72.085 ; v1@105.365,71.536 cw(c105.365,69.957) v1@106.481,71.074 ; 105.461,72.822 106.451,72.822 ; 105.994,72.365 106.136,72.222 ; 106.136,72.507 106.136,72.222 ; v1@106.269,71.074 cw(c107.385,69.957) 107.385,71.536 ; 106.381,71.536 cw(c106.381,69.957) v1@107.497,71.074 ; 106.959,73.33 106.426,73.863 ; 107.163,72.822 106.451,72.822 ; 107.213,72.085 105.705,72.085 v1@105.156,71.536 ; v1@107.285,71.074 cw(c108.401,69.957) 108.401,71.536 ; 107.397,71.536 cw(c107.397,69.957) v1@108.513,71.074 ; v1@108.179,70.917 108.179,71.12 v1@108.179,71.145 ; v1@108.258,70.986 cw(c108.88,70.909) 108.88,71.536 ; v1@108.355,71.108 cw(c108.756,70.021) v1@109.576,70.841 ; 108.449,71.536 cw(c108.449,70.044) v1@109.504,71.099 ; v1@109.004,70.841 ccw(c109.004,72.733) v1@110.342,71.395 ; v1@109.542,71.033 ccw(c108.88,70.849) 108.88,71.536 ; 109.576,70.567 cw(c110.835,70.567) v1@110.155,71.627 ; v1@110.316,71.374 cw(c109.7,72.355) 108.88,71.536 ; v1@110.381,71.463 cw(c109.576,71.673) v1@109.576,70.841 ; pad.0@88.197,64.778 pad.0@88.205,64.77 ; pad.0@88.205,64.77 88.205,63.686 89.289,63.686 ; 89.289,63.686 89.831,63.144 89.84,63.144 94.894,63.144 ; 94.894,63.144 v3@95.708,63.144 ; 97.307,68.91 100.96,72.563 100.96,72.836 ; 100.96,72.836 102.173,72.836 ; 102.173,72.836 102.593,73.256 ; 102.173,72.836 103.014,72.836 ; 102.593,73.256 103.014,72.836 ; 102.593,73.256 101.987,73.863 105.181,73.863 106.426,73.863 ; 103.014,72.836 103.745,72.836 ; 103.745,72.836 105.74,70.841 v1@109.576,70.841 ; 103.745,72.836 104.583,72.836 ; v1@105.156,71.536 108.88,71.536 ; 108.88,71.536 v1@109.576,70.841 ; pad.0@88.289,65.198 ccw(c88.956,64.914) 88.328,64.551 cw(c88.956,64.914) pad.0@88.289,65.198
  Bottom Layer w1.5: v11@105.181,72.923 105.181,73.863 v11@105.181,74.574 ; v11@105.326,73.326 ccw(c104.466,73.859) v11@105.181,74.574 ; v11@105.33,73.333 ccw(c104.408,73.852) 105.156,74.6 v11@105.181,74.574
  other v1: 110.515,65.075 112.141,65.659 110.515,66.472 111.455,68.631 106.375,70.968 108.407,70.968 109.398,70.993 105.461,71.247 112.42,72.06 105.156,72.187 104.496,79.832 106.197,80.62 110.312,80.797 111.912,80.797 113.512,80.797 115.112,80.797 116.712,80.797 105.588,81.966 107.975,82.042 109.575,82.042 111.175,82.042 112.775,82.042 115.975,82.042 106.782,82.474
  other v2: 81.077,77.622 85.217,82.169 127.66,91.364
  other v3: 87.224,36.373 87.224,37.846 87.204,39.319 87.528,44.399 88.113,48.565 86.843,63.754 88.392,63.779
  other v4: 89.332,78.511 91.008,80.035 95.326,86.208 98.45,87.884 91.338,92.735
  other v6: 88.519,65.1 90.856,95.682
  other v11: 105.156,73.431
  other v15: 82.956,45.364
  other v17: 86.843,62.357
HWKZ: R5.2 U1.17 U5.6 | length 38.4
  Top Layer w0.3: U1.17@91.775,88.677 92.1,89.003 ; 92.1,89.401 ccw(c93.024,89.401) U1.17@92.371,88.748 ; U1.17@92.308,88.777 cw(c92.327,89.003) 92.1,89.003 ; R5.2@111.395,99.997 R5.2@111.596,99.797 ; U5.6@111.395,101.864 109.113,101.864 107.429,103.549 97.961,103.549 94.844,100.432 91.677,100.432 91.211,99.966 91.211,96.469 92.1,95.58 92.1,89.003
  Top Layer w0.35: R5.2@111.395,99.997 U5.6@111.395,101.864 ; 111.395,100.944 ccw(c112.694,100.944) R5.2@111.776,100.026
HWPOW: C5.2 JX4.1 JX4.2 pad.0@110.95,112.956 pad.0@110.95,116.032 U5.4 | length 21.8
  Top Layer w0.6: JX4.1@110.947,109.082 110.947,106.172 110.414,105.639 110.414,104.546 111.43,103.53 ; pad.0@110.95,112.956 110.837,113.069 109.478,113.069 109.124,113.423 109.124,115.583 109.478,115.937 110.855,115.937 pad.0@110.95,116.032 ; JX4.1@110.983,109.285 ccw(c111.385,109.688) 111.385,109.118 ; JX4.1@111.176,109.118 C5.2@112.79,109.118 ; 111.931,109.118 cw(c111.931,108.231) C5.2@112.559,108.859
  Top Layer w0.7: pad.0@110.703,112.708 cw(c110.105,112.111) 110.95,112.111 cw(c111.795,112.111) pad.0@111.197,112.708 ; JX4.2@110.95,110.35 pad.0@110.95,112.956
  Top Layer w1.2: pad.0@110.95,116.006 v2(110.95,117.373)
  Bottom Layer w1.2: pad.0@110.95,116.006 v2(110.95,117.373)
IRQ: SPI1.1 SPI2.1 U1.11 | length 28.1
  Top Layer w0.254: v2@96.801,97.512 cw(c96.438,97.149) 96.952,97.149 cw(c97.466,97.149) v2@97.102,97.512 ; U1.11@96.952,89.902 v2(96.952,97.663) ; 96.952,90.841 ccw(c97.413,90.841) U1.11@97.087,90.514 ; 96.952,91.973 101.009,91.973 105.537,96.502 105.537,98.501
  Top Layer w0.7: 105.537,98.501 SPI1.1@105.537,100.032
  Bottom Layer w0.254: v2@96.801,97.814 ccw(c96.438,98.177) 96.952,98.177 ccw(c97.466,98.177) v2@97.102,97.814 ; v2(96.952,97.663) 96.952,98.222 97.6,98.87
  Bottom Layer w0.6: 97.6,98.87 97.6,101.803
L-G: pad.0@101.6,120.36 R1.1 | length 36.4
  Top Layer w0.254: R1.1@89.752,104.769 R1.1@89.865,104.882
  Top Layer w0.8: R1.1@89.682,104.89 ccw(c89.239,105.333) 89.865,105.333 ; R1.1@89.865,104.882 v2(89.865,105.816)
  Bottom Layer w0.254: 89.586,106.392 ccw(c90.441,106.392) v2@89.836,105.787 ; 89.586,107.005 ccw(c91.054,107.005) v2@90.016,105.967 ; v2@89.738,105.943 v2(89.865,105.816) 89.586,106.096 89.586,110.566 90.246,111.227 91.77,111.227 92.278,111.735 92.278,118.593 93.517,119.832 pad.0@101.468,119.832 ; 99.424,119.832 ccw(c99.424,122.236) pad.0@101.124,120.536 ; 100.038,119.832 ccw(c100.038,121.622) pad.0@101.304,120.356 ; 100.526,119.832 cw(c100.526,118.986) pad.0@101.124,119.584 ; 100.651,119.832 ccw(c100.651,121.009) pad.0@101.483,120.177
  Bottom Layer w0.8: 99.695,119.832 pad.0@101.6,119.832 ; 100.083,119.832 ccw(c100.083,121.577) pad.0@101.317,120.343
L-G-D: R1.2 U1.18 | length 21.4
  Top Layer w0.254: v2@90.146,91.569 cw(c89.783,91.205) 90.297,91.205 cw(c90.811,91.205) v2@90.448,91.569 ; 90.297,90.729 90.297,88.417 90.856,87.859 U1.18@91.75,87.859 ; 90.297,90.78 v2(90.297,91.719) ; 90.908,87.859 ccw(c90.908,88.22) U1.18@91.163,87.964 ; 90.999,87.859 cw(c90.999,87.626) U1.18@91.163,87.791
  Top Layer w0.8: v2(89.738,102.083) R1.2@89.738,103.069
  Bottom Layer w0.254: v2@89.588,101.932 cw(c88.654,100.998) 89.974,100.998 ; v2(89.738,102.083) 89.974,101.847 89.974,92.042 v2(90.297,91.719) ; v2@89.767,102.112 cw(c89.267,101.612) 89.974,101.612 ; 89.974,92.4 ccw(c90.977,92.4) v2@90.268,91.69 ; 89.974,93.013 ccw(c91.59,93.013) v2@90.448,91.87
L-R: 
L-R-D: R2.2 U1.10 | length 52.7
  Top Layer w0.254: U1.10@97.713,90.514 ccw(c97.503,90.724) 97.8,90.724 ccw(c98.097,90.724) U1.10@97.887,90.514 ; U1.10@97.8,89.902 97.8,91.069 98.146,91.415 101.168,91.415 106.274,96.52 v2(106.274,97.536) ; v2@106.123,97.385 cw(c105.759,97.022) 106.274,97.022 cw(c106.788,97.022) v2@106.424,97.385 ; 115.282,118.686 116.518,117.45 118.364,117.45 119.939,115.875 119.939,108.636 117.272,105.969 117.272,103.911 v2@115.697,102.337 ; v2@115.697,102.651 ccw(c115.697,103.411) 116.234,102.874 ; v2@115.91,102.438 cw(c116.179,102.438) 115.989,102.628
  Top Layer w0.6: R2.2@114.236,119.732 115.282,118.686 ; R2.2@114.6,119.732 ccw(c115.48,119.732) 114.858,119.11
  Bottom Layer w0.254: v2(106.274,97.536) 106.36,97.622 107.05,97.622 107.052,97.62 107.782,97.62 109.247,99.085 114.935,99.085 115.697,99.847 v2(115.697,102.438) ; v2@106.424,97.385 cw(c106.995,96.814) 106.995,97.622 ; v2@115.546,102.288 cw(c115.183,101.924) 115.697,101.924 cw(c116.211,101.924) v2@115.848,102.288
LED-G: 
LED-R: pad.0@106.68,120.36 R2.1 | length 8.8
  Top Layer w0.254: pad.0@106.68,119.832 106.68,119.609 pad.0@106.883,119.609 ; R2.1@112.536,119.507 R2.1@112.536,119.732
  Top Layer w0.5: 108.763,119.832 112.451,119.832 112.536,119.747 R2.1@112.536,119.507 ; 111.755,119.832 cw(c111.755,118.887) R2.1@112.423,119.555
  Top Layer w0.6: pad.0@106.883,119.609 pad.0@107.106,119.832
  Top Layer w0.8: pad.0@106.963,120.343 ccw(c108.197,121.577) 108.197,119.832 ; pad.0@107.106,119.832 108.763,119.832
MISO: SPI1.2 SPI2.2 U1.2 | length 40.4
  Top Layer w0.254: 97.866,96.597 cw(c99.161,96.597) v2@98.245,97.512 ; 97.866,97.21 cw(c98.548,97.21) v2@98.066,97.692 ; v2(98.095,97.663) 97.866,97.434 97.866,93.015 98.4,92.481 100.457,92.481 104.267,96.291 104.267,97.815 ; 100.768,83.877 v2(101.575,84.684) ; v2@101.108,93.345 cw(c100.593,93.345) 100.957,92.981 cw(c101.321,92.618) v2@101.321,93.132 ; v2@101.321,93.558 ccw(c101.321,94.072) 101.684,93.709 ccw(c102.048,93.345) v2@101.534,93.345 ; v2@101.362,84.684 cw(c100.847,84.684) 101.211,84.32 cw(c101.575,83.956) v2@101.575,84.471
  Top Layer w0.5: U1.2@99.825,83.877 100.768,83.877
  Top Layer w0.7: 104.267,97.815 SPI1.2@104.267,100.032
  Bottom Layer w0.254: v2@98.054,97.663 cw(c98.629,97.663) 98.222,98.07 ; v2(98.095,97.663) 98.095,97.942 98.87,98.718 ; v2@98.308,97.663 cw(c99.497,97.663) 98.656,98.504 ; v2@101.108,93.345 cw(c100.593,93.345) 100.957,92.981 cw(c101.321,92.618) v2@101.321,93.132 ; 101.142,85.076 ccw(c101.575,85.508) v2@101.575,84.897 ; 101.239,84.979 cw(c100.944,84.684) v2@101.362,84.684 ; v2(101.321,93.345) 99.644,91.669 99.644,86.574 v2@101.56,84.658
  Bottom Layer w0.6: 98.87,98.718 98.87,101.803